# Altium PCB PCB1.PcbDoc
Units mm, origin at the board's own origin, x right, y up, seen from the top; angles counter-clockwise.
Board outline 129 x 68 mm, 2 copper layers (Top Layer, Bottom Layer); 6 components, 31 nets, 80 pads, 0 vias.
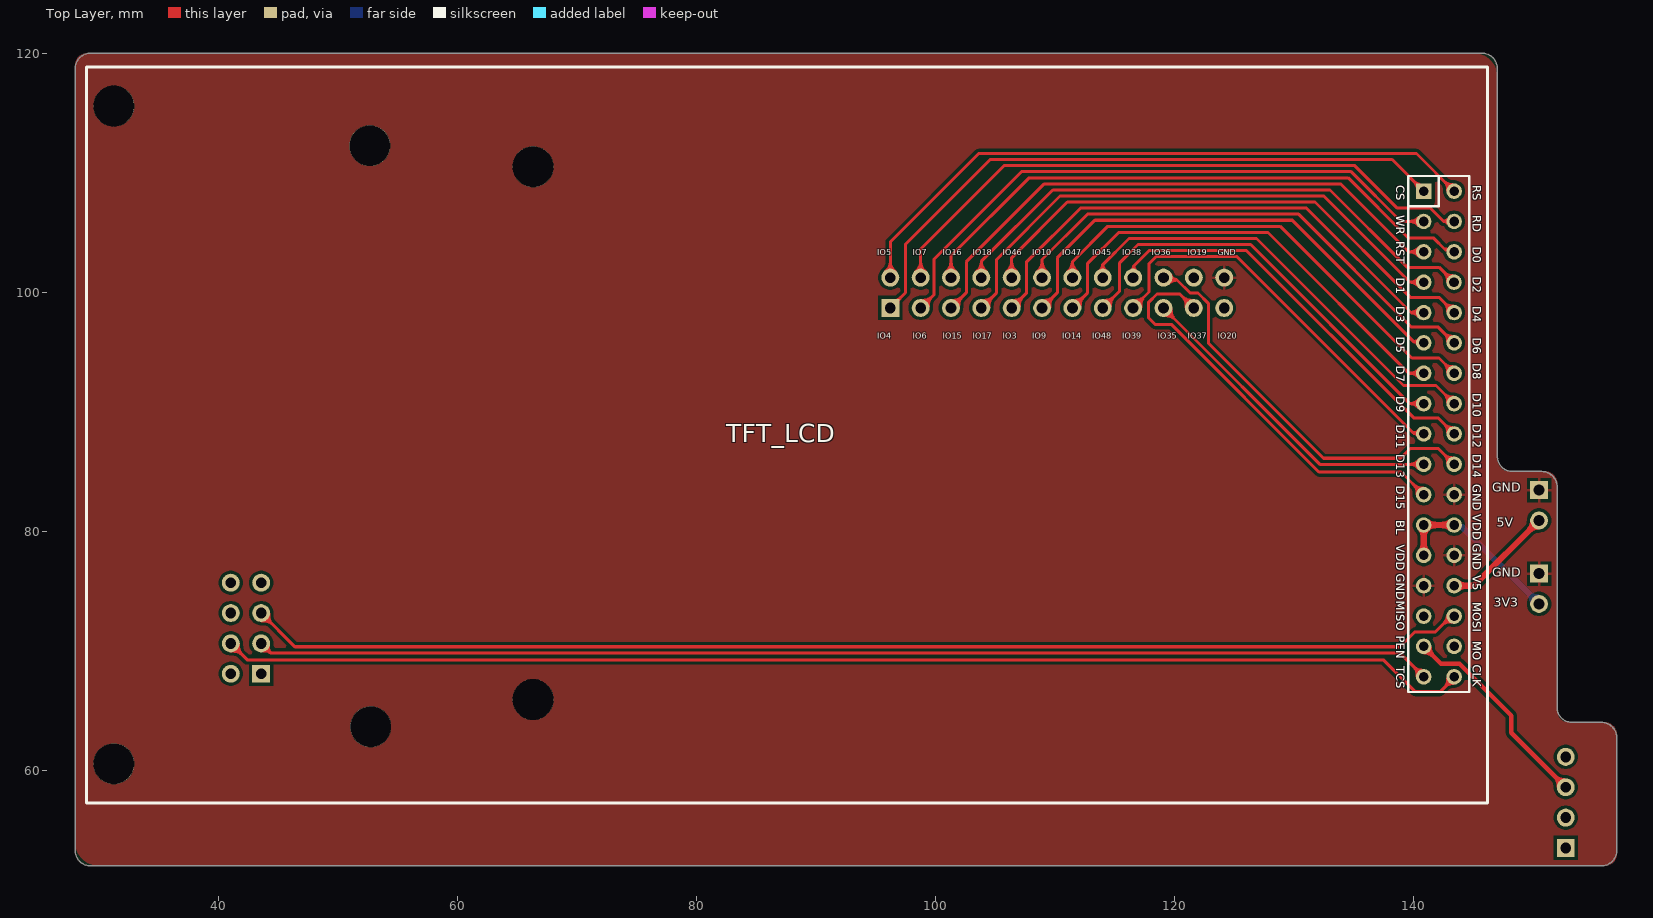
[diagram p0: Top Layer view]
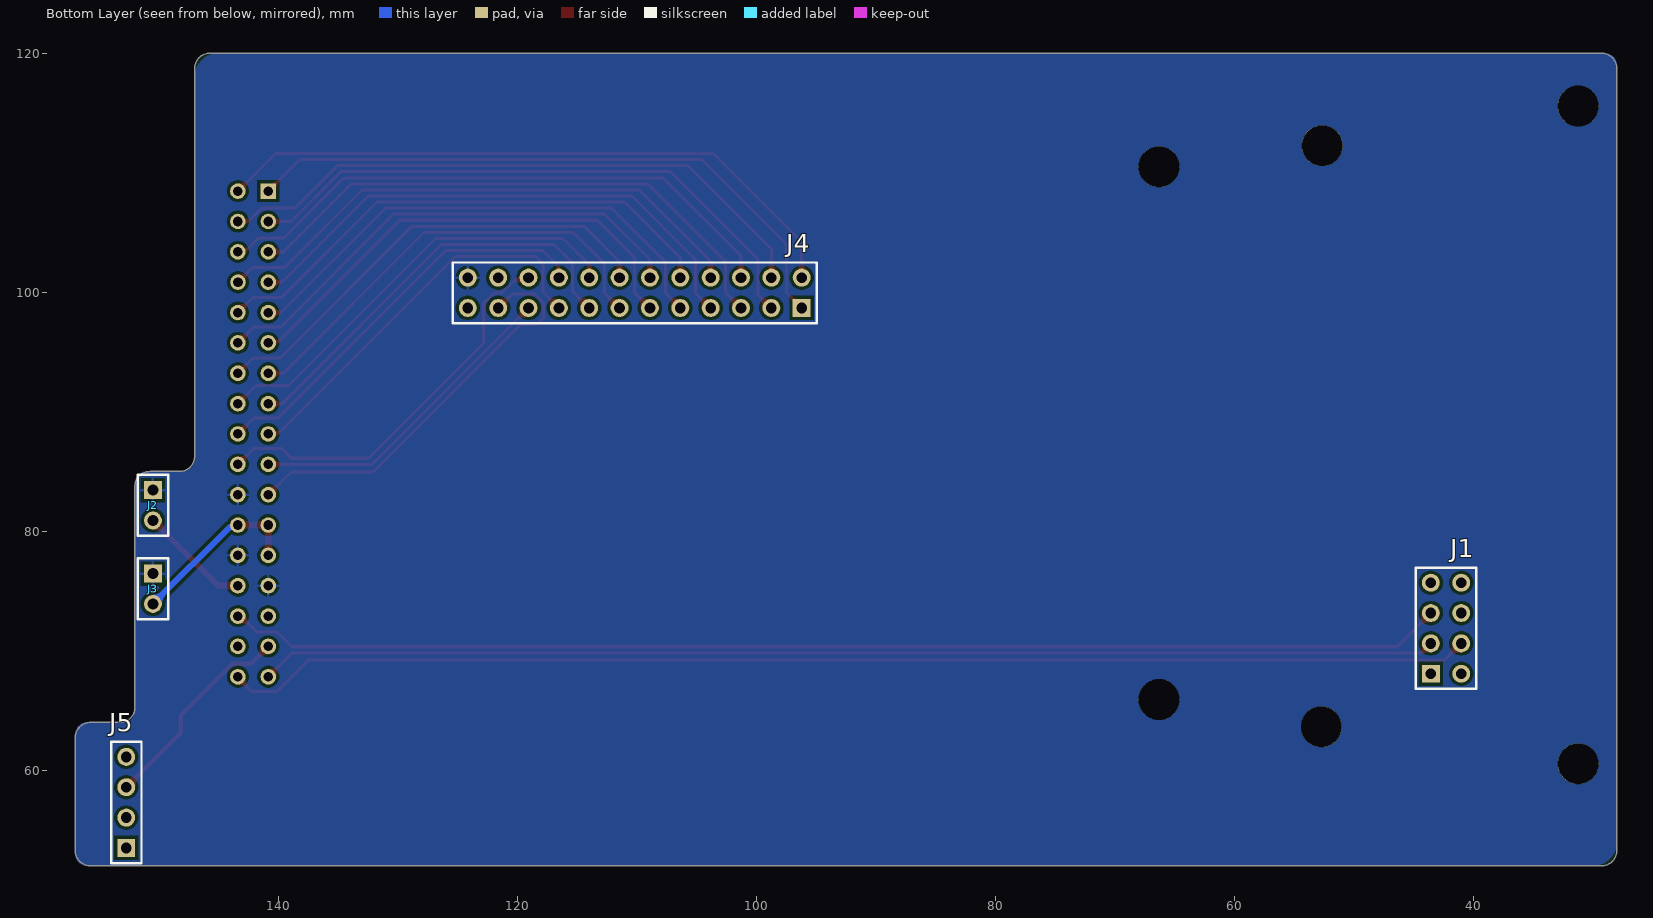
[diagram p1: Bottom Layer view, seen from below]
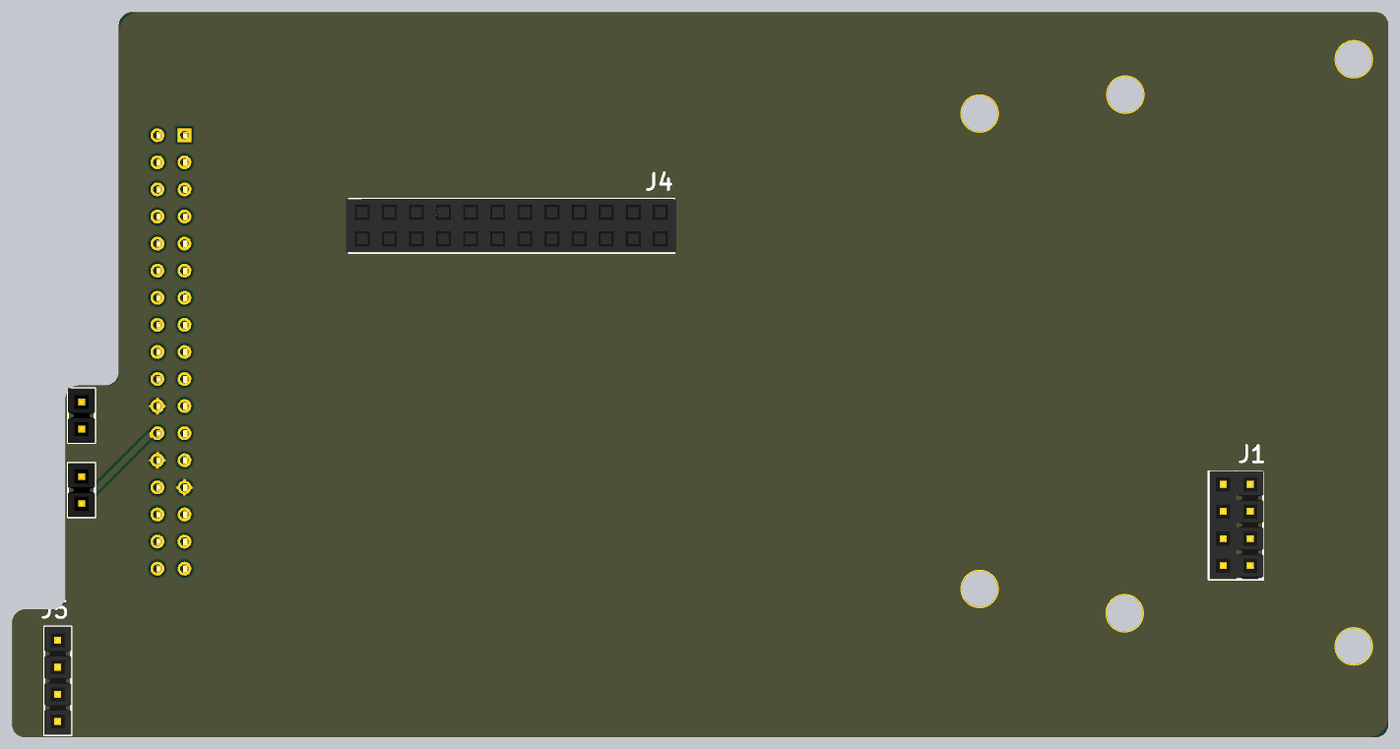
[diagram p2: 3D render of the assembled board from below, using the file's embedded part models]

## Layer stack, top to bottom
Top Solder: solder mask 0.0102, Solder Resist, Dk 3.5
Top Layer: signal copper 0.0356
Dielectric 1: dielectric 0.32, FR-4, Dk 4.8
Bottom Layer: signal copper 0.0356
Bottom Solder: solder mask 0.0102, Solder Resist, Dk 3.5

## Board outline
29.27,52 cw(c29.27,53.27) 28,53.27 28,118.73 cw(c29.27,118.73) 29.27,120 145.73,120 cw(c145.73,118.73) 147,118.73 147,86.27 ccw(c148.27,86.27) 148.27,85 150.73,85 cw(c150.73,83.73) 152,83.73 152,65.27 ccw(c153.27,65.27) 153.27,64 155.73,64 cw(c155.73,62.73) 157,62.73 157,53.27 cw(c155.73,53.27) 155.73,52

## Design rules (kind name [scope] priority, off if disabled: settings)
Clearance Clearance_JLC [All] p1: gap=0.254 ignorepadtopadclearanceinfootprint=TRUE except(0: Arc-Hole Track-Hole SMDPad-Hole THPad-Hole Via-Hole Fill-Hole Poly-Hole Region-Hole Text-Hole; 0.152: Arc-Arc Arc-Track Arc-SMDPad Arc-Text Track-SMDPad Track-Text SMDPad-Fill SMDPad-Poly SMDPad-Region SMDPad-Text THPad-Text Via-Fill Via-Poly Via-Region Via-Text Fill-Text Poly-Text Region-Text Text-Text; 0.203: SMDPad-SMDPad)
PolygonConnect [All] p1: connectstyle=Relief reliefconductorwidth=0.254 reliefentries=4 polygonreliefangle="90 Angle" airgapwidth=0.254
RoutingVias [All] p1: holewidth=0.711 width=1.27 viastyle="Through Hole" minholewidth=0.711 minwidth=1.27 maxholewidth=0.711 maxwidth=1.27
SolderMaskExpansion [All] p1: expansion=0.102 istentingtop=FALSE
SupplyNets "Schematic Supply Nets_4" [InNet('3V3')] p1: voltage=0.000
SupplyNets "Schematic Supply Nets_3" [InNet('+5')] p2: voltage=0.000
SupplyNets "Schematic Supply Nets_1" [InNet('GND')] p3: voltage=0.000
Width [All] p1: maxlimit=1.27 minlimit=0.254 preferedwidth=0.254
30 further rules are at their usual default settings.

## Components (designator, comment, footprint, x,y, rotation, side; value= is the part's Value field where it differs from the comment)
J1 "Header4X2" HDR4X2 43.561,68.072 r90 bottom
J2 "Header 2" HDR2 150.495,83.439 r270 bottom
J3 "Header 2" HDR2 150.495,76.454 r270 bottom
J4 "Header12X2" HDR12X2_Female 96.206,98.679 r0 bottom
J5 "Header 4" HDR4 152.725,53.495 r90 bottom
TFT_LCD "TFTLCD" TFTLCD-4.3 140.837,108.456 r270 top

## Footprints (in the part's own frame and the unit in brackets; to place one, negate y for a bottom-side part, rotate by r counter-clockwise, add the part's x,y. Pads: shape width x height; smd on the part's side, far side on the other; paste and mask are expansions set on the pad)
HDR2 [mm]
  rect 1.5x1.5 hole 0.9: 1(0,0)
  round 1.5 hole 0.9: 2(2.54,0)
  silkscreen extent -1.27,-1.27 3.81,1.27, body extent -1.27,-1.27 3.81,1.27, height 8.41
HDR4 [mm]
  rect 1.5x1.5 hole 0.9: 1(0,0)
  round 1.5 hole 0.9: 2(2.54,0) 3(5.08,0) 4(7.62,0)
  silkscreen extent -1.27,-1.27 8.89,1.27, body extent -1.27,-1.27 8.89,1.27, height 8.37
HDR4X2 [mm]
  rect 1.5x1.5 hole 0.9: 1(0,0)
  round 1.5 hole 0.9: 2(2.54,0) 3(5.08,0) 4(7.62,0) 5(7.62,-2.54) 6(5.08,-2.54) 7(2.54,-2.54) 8(0,-2.54)
  silkscreen extent -1.27,-3.81 8.86,1.27, body extent -1.24,-3.89 8.92,1.19, height 8.37
HDR12X2_Female [mm]
  rect 1.5x1.5 hole 0.9: 1(0,0)
  round 1.5 hole 0.9: 2(2.54,0) 3(5.08,0) 4(7.62,0) 5(10.16,0) 6(12.7,0) 7(15.24,0) 8(17.78,0) 9(20.32,0) 10(22.86,0) 11(25.4,0) 12(27.94,0) 13(27.94,-2.54) 14(25.4,-2.54) 15(22.86,-2.54) 16(20.32,-2.54) 17(17.78,-2.54) 18(15.24,-2.54) 19(12.7,-2.54) 20(10.16,-2.54) 21(7.62,-2.54) 22(5.08,-2.54) 23(2.54,-2.54) 24(0,-2.54)
  silkscreen extent -1.27,-3.81 29.21,1.27, body extent -1.49,-3.8 29.49,1.2, height 8.6
TFTLCD-4.3 [mm]
  rect 1.3x1.3 hole 0.8: 1(-0.002,0.006)
  round 1.3 hole 0.8: 2(-0.002,2.546) 3(2.538,0.006) 4(2.538,2.546) 5(5.08,0) 6(5.078,2.546) 7(7.62,0) 8(7.62,2.54) 9(10.158,0.006) 10(10.158,2.546) 11(12.698,0.006) 12(12.698,2.546) 13(15.238,0.006) 14(15.238,2.546) 15(17.778,0.006) 16(17.778,2.546) 17(20.318,0.006) 18(20.318,2.546) 19(22.858,0.006) 20(22.858,2.546) 21(25.398,0.006) 22(25.398,2.546) 23(27.938,0.006) 24(27.938,2.546) 25(30.478,0.006) 26(30.478,2.546) 27(33.018,0.006) 28(33.018,2.546) 29(35.558,0.006) 30(35.558,2.546) 31(38.098,0.006) 32(38.098,2.546) 33(40.638,0.006) 34(40.638,2.546)
  round 3.4 hole 3.4: ""(-7.125,-109.596) ""(-3.81,-88.18) ""(-2.037,-74.525) ""(42.54,-74.525) ""(44.82,-88.12) ""(47.925,-109.596)
  silkscreen extent -10.4,-111.89 51.19,5.33, body extent -1.49,-1.32 42.19,3.68, height 8.6

## Part data
TFT_LCD: "正点原子MCU屏通用接口"

## Nets (pads, with @x,y where several pads share a name; then routed paths per layer and width w, separated by ;. In a path a pad name is that pad's centre, name@x,y a point inside that pad or via, vN(x,y) a via of type N, cw(c..) or ccw(c..) an arc to the next point about the centre after c; other vN are vias at no path point)
3V3: J3.2 TFT_LCD.23 TFT_LCD.24 TFT_LCD.25 | length 14.9
  Top Layer w0.508: TFT_LCD.25 TFT_LCD.23 TFT_LCD.24
  Bottom Layer w0.508: TFT_LCD.24 143.535,80.366 144.043,80.366 J3.2
+5: J2.2 TFT_LCD.28 | length 9.4
  Top Layer w0.508: TFT_LCD.28 145.034,75.438 J2.2
CLK: J1.7 TFT_LCD.34 | length 104.6
  Top Layer w0.254: J1.7 42.393,69.24 137.465,69.24 140.132,66.573 142.215,66.573 143.383,67.742 TFT_LCD.34
CS: J4.1 TFT_LCD.1 | length 53.3
  Top Layer w0.254: J4.1 97.485,99.958 97.485,104.013 104.572,111.1 138.201,111.1 TFT_LCD.1
DB0: J4.22 TFT_LCD.6 | length 49.2
  Top Layer w0.254: J4.22 101.286,103.039 107.823,109.576 134.518,109.576 139.573,104.521 141.681,104.521 142.629,103.574 143.187,103.574 TFT_LCD.6
DB1: J4.4 TFT_LCD.7 | length 45.5
  Top Layer w0.254: J4.4 105.105,99.958 105.105,102.743 110.414,108.052 132.486,108.052 139.702,100.836 TFT_LCD.7
DB2: J4.21 TFT_LCD.8 | length 46.6
  Top Layer w0.254: J4.21 103.826,102.581 109.804,108.56 132.994,108.56 139.471,102.083 142.13,102.083 TFT_LCD.8
DB3: J4.5 TFT_LCD.9 | length 43.1
  Top Layer w0.254: J4.5 107.594,99.907 107.594,102.514 112.116,107.036 131.039,107.036 139.776,98.298 TFT_LCD.9
DB4: J4.20 TFT_LCD.10 | length 44.4
  Top Layer w0.254: J4.20 106.366,102.886 111.023,107.544 131.75,107.544 139.725,99.568 142.113,99.568 TFT_LCD.10
DB5: J4.6 TFT_LCD.11 | length 40.9
  Top Layer w0.254: J4.6 110.185,99.958 110.185,102.88 113.325,106.02 129.845,106.02 140,95.865 140.736,95.865 TFT_LCD.11
DB6: J4.19 TFT_LCD.12 | length 42
  Top Layer w0.254: J4.19 108.906,102.734 112.7,106.528 130.378,106.528 139.827,97.079 142.062,97.079 TFT_LCD.12
DB7: J4.7 TFT_LCD.13 | length 38.3
  Top Layer w0.254: J4.7 112.725,99.958 112.725,102.413 115.316,105.004 127.813,105.004 139.598,93.218 TFT_LCD.13
DB8: J4.18 TFT_LCD.14 | length 39.6
  Top Layer w0.254: J4.18 111.446,102.556 114.402,105.512 128.829,105.512 139.852,94.488 142.113,94.488 TFT_LCD.14
DB9: J4.8 TFT_LCD.15 | length 35.9
  Top Layer w0.254: J4.8 115.367,100.06 115.367,102.413 116.942,103.988 126.365,103.988 139.675,90.678 TFT_LCD.15
DB10: J4.17 TFT_LCD.16 | length 37.1
  Top Layer w0.254: J4.17 113.986,102.302 116.18,104.496 126.848,104.496 139.156,92.187 141.874,92.187 TFT_LCD.16
DB11: J4.9 TFT_LCD.17 | length 33.6
  Top Layer w0.254: J4.9 117.856,100.009 117.856,102.387 118.44,102.972 125.222,102.972 139.974,88.219 140.762,88.219 TFT_LCD.17
DB12: J4.16 TFT_LCD.18 | length 34.7
  Top Layer w0.254: J4.16 116.578,101.271 116.578,102.201 117.856,103.48 126.009,103.48 140.005,89.484 142.037,89.484 TFT_LCD.18
DB13: J4.10 TFT_LCD.19 | length 27.2
  Top Layer w0.254: J4.10 132.147,85.598 TFT_LCD.19
DB14: J4.15 TFT_LCD.20 | length 33.5
  Top Layer w0.254: J4.15@119.151,101.304 J4.15 119.256,101.029 120.197,101.029 121.3,99.925 121.959,99.925 122.818,99.066 122.818,95.749 132.461,86.106 138.913,86.106 139.725,86.919 142.062,86.919 TFT_LCD.20
DB15: J4.11 TFT_LCD.21 | length 35
  Top Layer w0.254: J4.11 120.438,99.847 118.516,99.847 117.831,99.162 117.831,97.841 118.364,97.307 119.719,97.307 132.064,84.963 138.938,84.963 TFT_LCD.21
GND: J2.1 J3.1 J4.13 TFT_LCD.22 TFT_LCD.26 TFT_LCD.27
IO5: J4.24 TFT_LCD.2 | length 54.5
  Top Layer w0.254: J4.24 96.206,104.206 103.608,111.608 140.233,111.608 TFT_LCD.2
IO6: J4.2 TFT_LCD.3 | length 50.3
  Top Layer w0.254: J4.2 99.877,99.81 99.877,102.773 107.188,110.084 134.772,110.084 138.938,105.918 TFT_LCD.3
IO7: J4.23 TFT_LCD.4 | length 51.9
  Top Layer w0.254: J4.23 98.746,103.623 105.715,110.592 135.077,110.592 138.633,107.036 141.402,107.036 142.501,105.937 143.364,105.937 TFT_LCD.4
IO15: J4.3 TFT_LCD.5 | length 47.7
  Top Layer w0.254: J4.3 102.565,99.958 102.565,102.54 109.093,109.068 133.883,109.068 139.575,103.376 TFT_LCD.5
IO19: J4.14
IO20: J4.12
MISO: TFT_LCD.29
MO: J1.3 TFT_LCD.30 | length 102.1
  Top Layer w0.254: J1.3 46.38,70.333 138.862,70.333 140.106,71.577 141.834,71.577 143.154,72.898 TFT_LCD.30
T_CS: J1.2 TFT_LCD.33 | length 98.4
  Top Layer w0.254: J1.2 44.348,69.825 138.836,69.825 TFT_LCD.33
T_PEN: J5.3 TFT_LCD.31 | length 17.6
  Top Layer w0.381: TFT_LCD.31 142.289,68.912 143.836,68.912 148.174,64.575 148.174,63.126 J5.3
pads on no net: J1.1 J1.4 J1.5 J1.6 J1.8 J5.1 J5.2 J5.4 TFT_LCD. TFT_LCD.32

## Polygon pours and split planes (outlines as drawn)
GND on Bottom Layer "AGND_L01_P-001" (solid, remove dead copper, pour order 0): 145,120 cw(c145,118) 147,118 147,86 ccw(c148,86) 148,85 151,85 cw(c151,84) 152,84 152,65 ccw(c153,65) 153,64 156,64 cw(c156,63) 157,63 157,53 cw(c156,53) 156,52 30,52 cw(c30,54) 28,54 28,119 cw(c29,119) 29,120
GND on Top Layer "AGND_L01_P-001" (solid, remove dead copper, pour order 1): 145,120 cw(c145,118) 147,118 147,86 ccw(c148,86) 148,85 151,85 cw(c151,84) 152,84 152,65 ccw(c153,65) 153,64 156,64 cw(c156,63) 157,63 157,53 cw(c156,53) 156,52 30,52 cw(c30,54) 28,54 28,119 cw(c29,119) 29,120

## Silkscreen, mask and mechanical layers (free items; w line width, h text height)
Top Overlay:
  text "IO5" at 95.1,103.1 h0.5
  text "IO7" at 98.1,103.1 h0.5
  text "IO16" at 100.6,103.1 h0.5
  text "IO18" at 103.1,103.1 h0.5
  text "IO46" at 105.6,103.1 h0.5
  text "IO10" at 108.1,103.1 h0.5
  text "IO47" at 110.6,103.1 h0.5
  text "IO45" at 113.1,103.1 h0.5
  text "IO38" at 115.6,103.1 h0.5
  text "IO36" at 118.1,103.1 h0.5
  text "IO19" at 121.1,103.1 h0.5
  text "GND" at 123.6,103.1 h0.5
  text "IO4" at 95.1,96.1 h0.5
  text "IO6" at 98.1,96.1 h0.5
  text "IO15" at 100.6,96.1 h0.5
  text "IO17" at 103.1,96.1 h0.5
  text "IO3" at 105.6,96.1 h0.5
  text "IO9" at 108.1,96.1 h0.5
  text "IO14" at 110.6,96.1 h0.5
  text "IO48" at 113.1,96.1 h0.5
  text "IO39" at 115.6,96.1 h0.5
  text "IO35" at 118.6,96.1 h0.5
  text "IO37" at 121.1,96.1 h0.5
  text "IO20" at 123.6,96.1 h0.5
  text "GND" at 146.558,83.312 h0.76
  text "5V" at 146.939,80.391 h0.76
  text "GND" at 146.558,76.2 h0.76
  text "3V3" at 146.685,73.66 h0.76
Mechanical 1:
  lines w0.508: 28,53.27 ccw(c29.27,53.27) 29.27,52 155.73,52 ccw(c155.73,53.27) 157,53.27 157,62 157,62.73 ccw(c155.73,62.73) 155.73,64 153.27,64 cw(c153.27,65.27) 152,65.27 152,83.73 ccw(c150.73,83.73) 150.73,85 148.27,85 cw(c148.27,86.27) 147,86.27 147,118.73 ccw(c145.73,118.73) 145.73,120 29.27,120 ccw(c29.27,118.73) 28,118.73 28,53.27
Mechanical 2:
  drawing of 7238 lines, arcs and shapes, not listed
Mechanical 3:
  drawing of 219 lines, arcs and shapes, not listed

## Text inside footprints (layer, text, board x,y; h text height)
TFT_LCD: Top Overlay "BL" at 138.551,80.897 h0.71 r270; Top Overlay "MISO" at 138.551,74.166 h0.71 r270; Top Overlay "TCS" at 138.551,68.705 h0.71 r270; Top Overlay "MO" at 144.937,70.806 h0.71 r270; Top Overlay "MOSI" at 144.937,74.056 h0.71 r270; Top Overlay "CLK" at 144.937,68.806 h0.71 r270; Top Overlay "PEN" at 138.551,71.245 h0.71 r270; Top Overlay "D11" at 138.551,88.898 h0.71 r270; Top Overlay "GND" at 138.551,76.452 h0.71 r270; Top Overlay "GND" at 144.937,83.931 h0.71 r270; Top Overlay "RD" at 144.937,106.431 h0.71 r270; Top Overlay "D0" at 144.937,103.806 h0.71 r270; Top Overlay "D10" at 144.937,91.556 h0.71 r270; Top Overlay "VDD" at 144.937,81.431 h0.71 r270; Top Overlay "GND" at 144.937,78.931 h0.71 r270; Top Overlay "V5" at 144.937,76.306 h0.71 r270; Top Overlay "VDD" at 138.551,78.865 h0.71 r270; Top Overlay "D15" at 138.551,83.818 h0.71 r270; Top Overlay "D12" at 144.937,88.931 h0.71 r270; Top Overlay "D13" at 138.541,86.431 h0.71 r270; Top Overlay "D9" at 138.551,91.311 h0.71 r270; Top Overlay "D8" at 144.937,94.056 h0.71 r270; Top Overlay "D6" at 144.937,96.181 h0.71 r270; Top Overlay "D5" at 138.551,96.264 h0.71 r270; Top Overlay "D4" at 144.937,98.806 h0.71 r270; Top Overlay "D3" at 138.551,98.804 h0.71 r270; Top Overlay "D2" at 144.937,101.306 h0.71 r270; Top Overlay "D1" at 138.551,101.217 h0.71 r270; Top Overlay "RST" at 138.551,104.265 h0.71 r270; Top Overlay "WR" at 138.551,106.424 h0.71 r270; Top Overlay "CS" at 138.551,108.964 h0.71 r270; Top Overlay "RS" at 144.937,108.931 h0.71 r270; Top Overlay "D7" at 138.551,93.851 h0.71 r270; Top Overlay "D14" at 144.937,86.431 h0.71 r270; Top Overlay "BL" at 138.557,80.899 h0.71 r270; Top Overlay "MISO" at 138.557,74.168 h0.71 r270; Top Overlay "TCS" at 138.557,68.707 h0.71 r270; Top Overlay "MO" at 144.943,70.808 h0.71 r270; Top Overlay "MOSI" at 144.943,74.058 h0.71 r270; Top Overlay "CLK" at 144.943,68.808 h0.71 r270; Top Overlay "PEN" at 138.557,71.247 h0.71 r270; Top Overlay "D11" at 138.557,88.9 h0.71 r270; Top Overlay "GND" at 138.557,76.454 h0.71 r270; Top Overlay "GND" at 144.943,83.933 h0.71 r270; Top Overlay "RD" at 144.943,106.433 h0.71 r270; Top Overlay "D0" at 144.943,103.808 h0.71 r270; Top Overlay "D10" at 144.943,91.558 h0.71 r270; Top Overlay "VDD" at 144.943,81.433 h0.71 r270; Top Overlay "GND" at 144.943,78.933 h0.71 r270; Top Overlay "VDD" at 138.557,78.867 h0.71 r270; Top Overlay "D15" at 138.557,83.82 h0.71 r270; Top Overlay "D12" at 144.943,88.933 h0.71 r270; Top Overlay "D9" at 138.557,91.313 h0.71 r270; Top Overlay "D8" at 144.943,94.058 h0.71 r270; Top Overlay "D6" at 144.943,96.183 h0.71 r270; Top Overlay "D5" at 138.557,96.266 h0.71 r270; Top Overlay "D4" at 144.943,98.808 h0.71 r270; Top Overlay "D3" at 138.557,98.806 h0.71 r270; Top Overlay "D2" at 144.943,101.308 h0.71 r270; Top Overlay "D1" at 138.557,101.219 h0.71 r270; Top Overlay "RST" at 138.557,104.267 h0.71 r270; Top Overlay "WR" at 138.557,106.426 h0.71 r270; Top Overlay "CS" at 138.557,108.966 h0.71 r270; Top Overlay "RS" at 144.943,108.933 h0.71 r270; Top Overlay "D7" at 138.557,93.853 h0.71 r270; Top Overlay "D14" at 144.943,86.433 h0.71 r270; Top Overlay "V5" at 144.943,76.308 h0.71 r270